# EAGLE board 4p connector board Rev A (EAGLE 7.5.0)
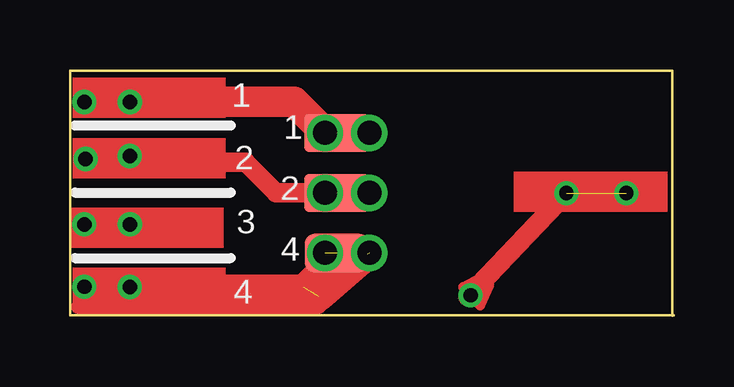
[diagram p0: board, top side]
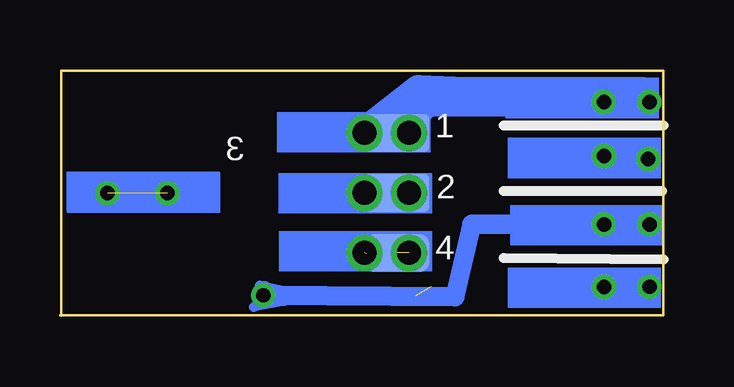
[diagram p1: board, bottom side, seen from below]

Size 25.16 x 10.21 mm. Coordinates in mm from the lower left corner, seen from the top.
Outline: 25.16,0 0,0 0,10.21 25.1,10.21 25.1,0
Copper layers (1*16): Top 0.035mm / dielectric 1.5mm / Bottom 0.035mm
Design rules "default": minimum track width 10mil, minimum drill 24mil, track to track 8mil, track to pad 8mil, pad to pad 8mil, via to via 8mil, smd to smd 8mil, copper to edge 40mil, drill to drill 8mil, minimum pad ring 10mil, minimum via ring 8mil, stop-mask expansion 4mil, vias tented up to drill 0mil, thermal gap 10mil

## Footprints (pad centres in the part's own frame; a part is rotated, then mirrored left to right if it is on the bottom)
WS2812B_CONNECTOR = smd 2.7 x 1.6 bottom: 5V 0,2.5; DATA1 0,0; GND1 0,-2.5 | smd 2.7 x 1.6: 5V1 0,2.5; DATA 0,0; GND 0,-2.5 | drill 1: 5V_1 1.35,2.5; 5V_2 -0.5,2.5 | drill 1 pad 1.5: DATA_1 1.35,0; DATA_2 -0.5,0; GND_1 1.35,-2.5; GND_2 -0.5,-2.5

## Placement (x,y rotation side)
U$1  WS2812B_CONNECTORSTANDARD  [WS2812B_CONNECTOR]  11.11,5.11 0 top

## Library data of the parts
U$1 = blinkinlabs

## Nets
DI: U$1.DATA U$1.DATA1 U$1.DATA_1 U$1.DATA_2
GND: U$1.GND U$1.GND1 U$1.GND_1 U$1.GND_2
VCC: U$1.5V U$1.5V1 U$1.5V_1 U$1.5V_2

## Tracks (layer width: path | path; a pad name or v marks a point on that pad's centre or on a via)
DI  (2 unrouted)
  Top 0.813: U$1.DATA_2 10.6,5.12 | 10.6,5.12 9.84,5.12 8.57,5.12 7.3,6.39 0.95,6.39 | U$1.DATA_1 12.45,5.12 U$1.DATA1 | U$1.DATA1 11.1,5.12 10.6,5.12
DO  (via drill 0.6)  (1 unrouted)
  Top 0.61: v20.68,5.1 16.57,0.78 v16.69,0.85
  Bottom 0.61: 3.88,3.8 v2.48,3.8 v0.58,3.8 | v16.69,0.85 16.63,1.13
  Bottom 0.813: v2.48,3.8 7.98,3.8 8.69,0.78 v16.69,0.85
  other vias: 23.18,5.1
DO1  (via drill 0.6)  (1 unrouted)
  Top 0.813: v20.68,5.1 16.57,0.78
  other vias: 23.18,5.1
GND  (via drill 0.6)  (4 unrouted)
  Top 0.61: 7.56,0.55 0.32,0.36 10.35,0.36 12.38,2.58
  Top 1.016: U$1.GND 9.7,1.2 v0.58,1.2
  Top 1.27: 12.38,2.58 10.35,0.81 4.25,0.81
S$1  (via drill 0.6)
  Top 0.813: v2.48,6.65 2.35,6.52 v0.64,6.52
S$2
  Bottom 1.27: 0.89,9.32 9.59,9.32 11.11,7.67 9.84,8.94 6.03,8.94
S$3  (via drill 0.6)
  other vias: 2.48,1.19
S$4
  Bottom 1.27: 12.51,7.6 10.22,9.38 6.67,9.25
S$5
  Top 0.406: 17.46,1.31 17.08,0.43 16.38,1.19 17.46,1.76
S$6
  Bottom 0.406: 16.83,1.25 15.62,1 15.81,0.62 17.08,0.36
VCC  (via drill 0.6)  (1 unrouted)
  Top 1.016: v0.58,8.9 v2.48,8.9
  Top 1.27: U$1.5V_2 9.32,8.9 v2.48,8.9
(copper drawn outside any net)
  shapes: Bottom area x11, Top area x6

## Text on the board
tPlace: 1 | 1 | 2 | 2 | 3 | 4 | 4
bPlace: 1 | 3 | 2 | 4